# Altium PCB lab1.PcbDoc
Units mm, origin at the board's own origin, x right, y up, seen from the top; angles counter-clockwise.
Board outline 49 x 56.6 mm, 2 copper layers (Top Layer, Bottom Layer); 38 components, 47 nets, 159 pads, 43 vias.
Unrouted connection lines stored in the file: 3.
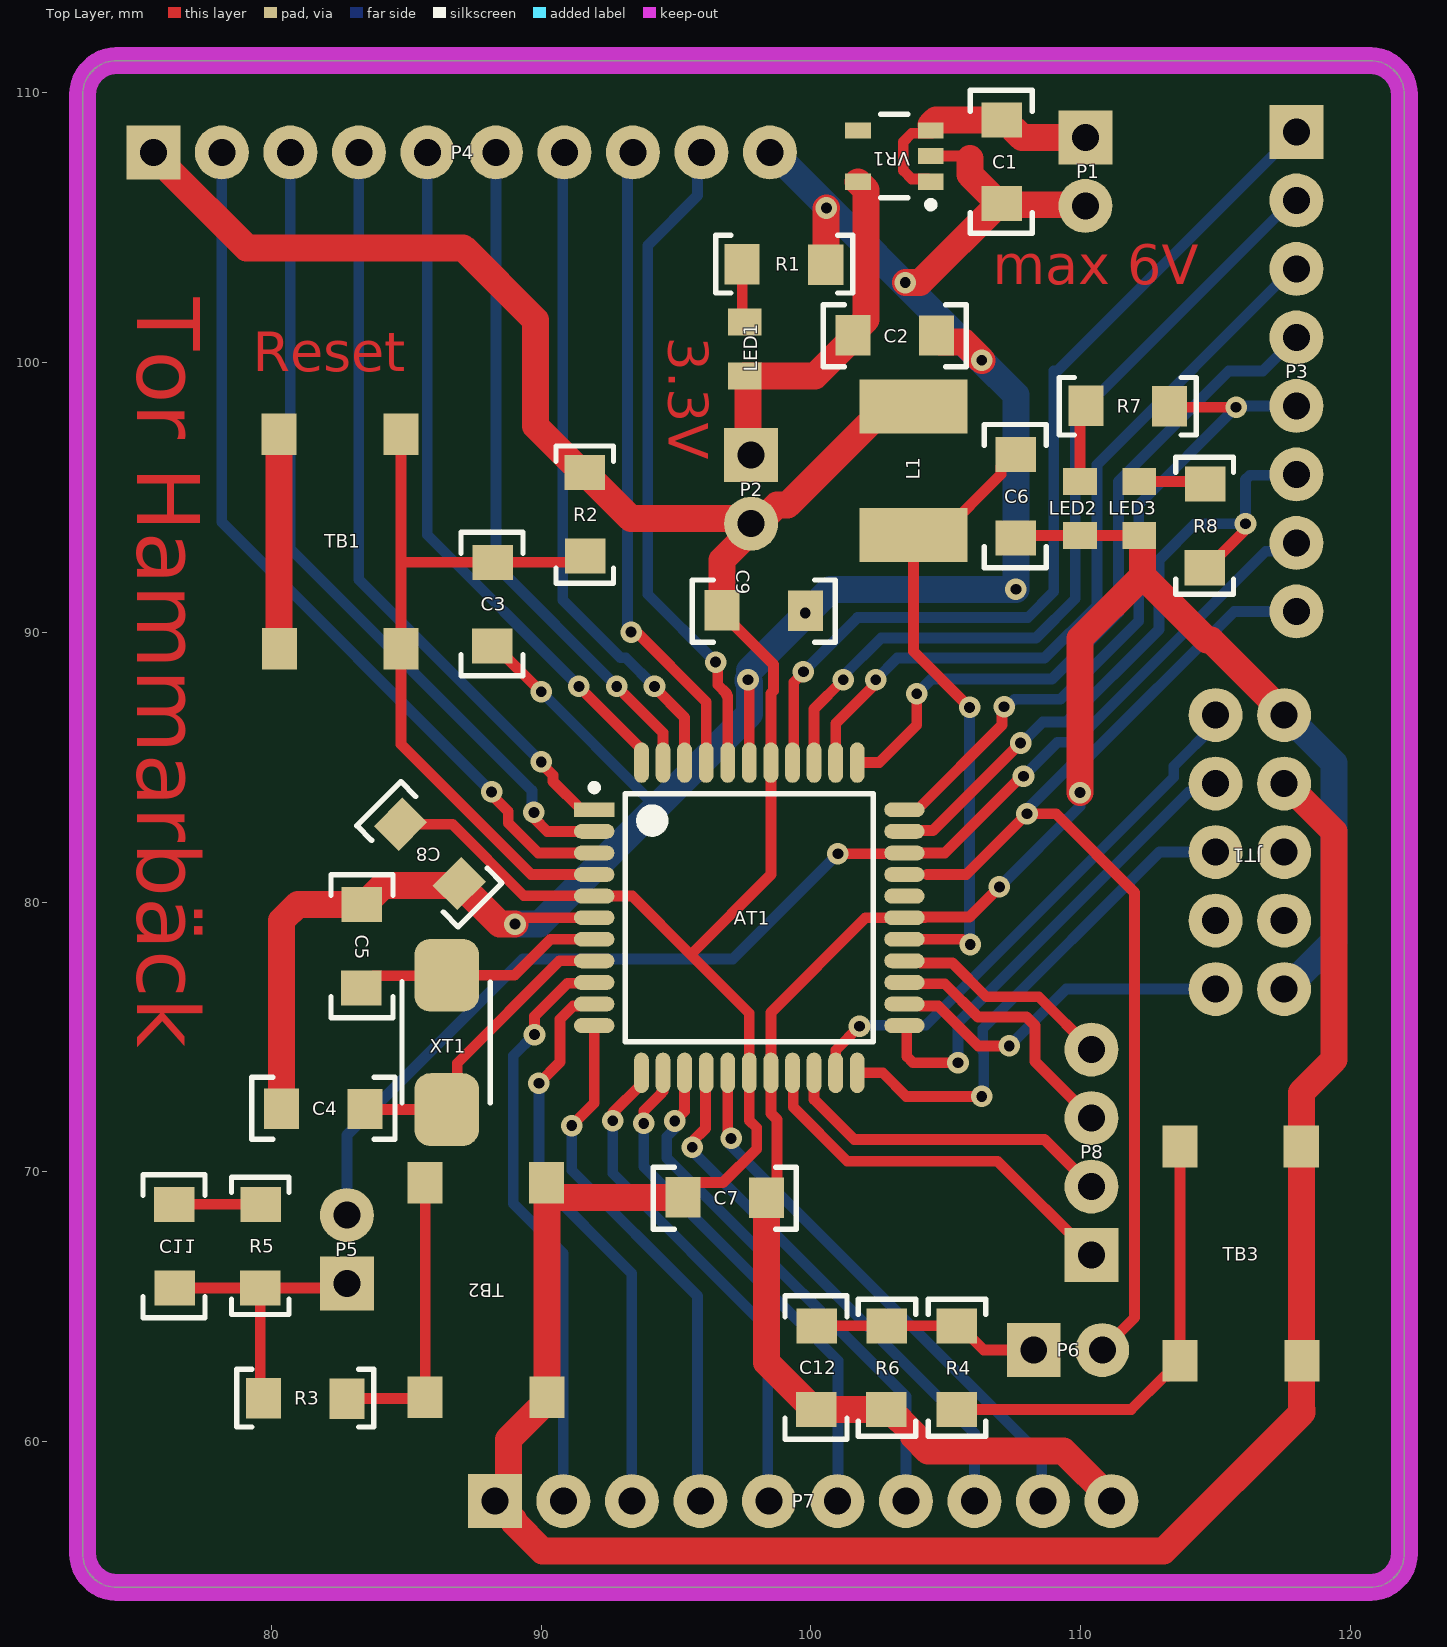
[diagram p0: Top Layer view]
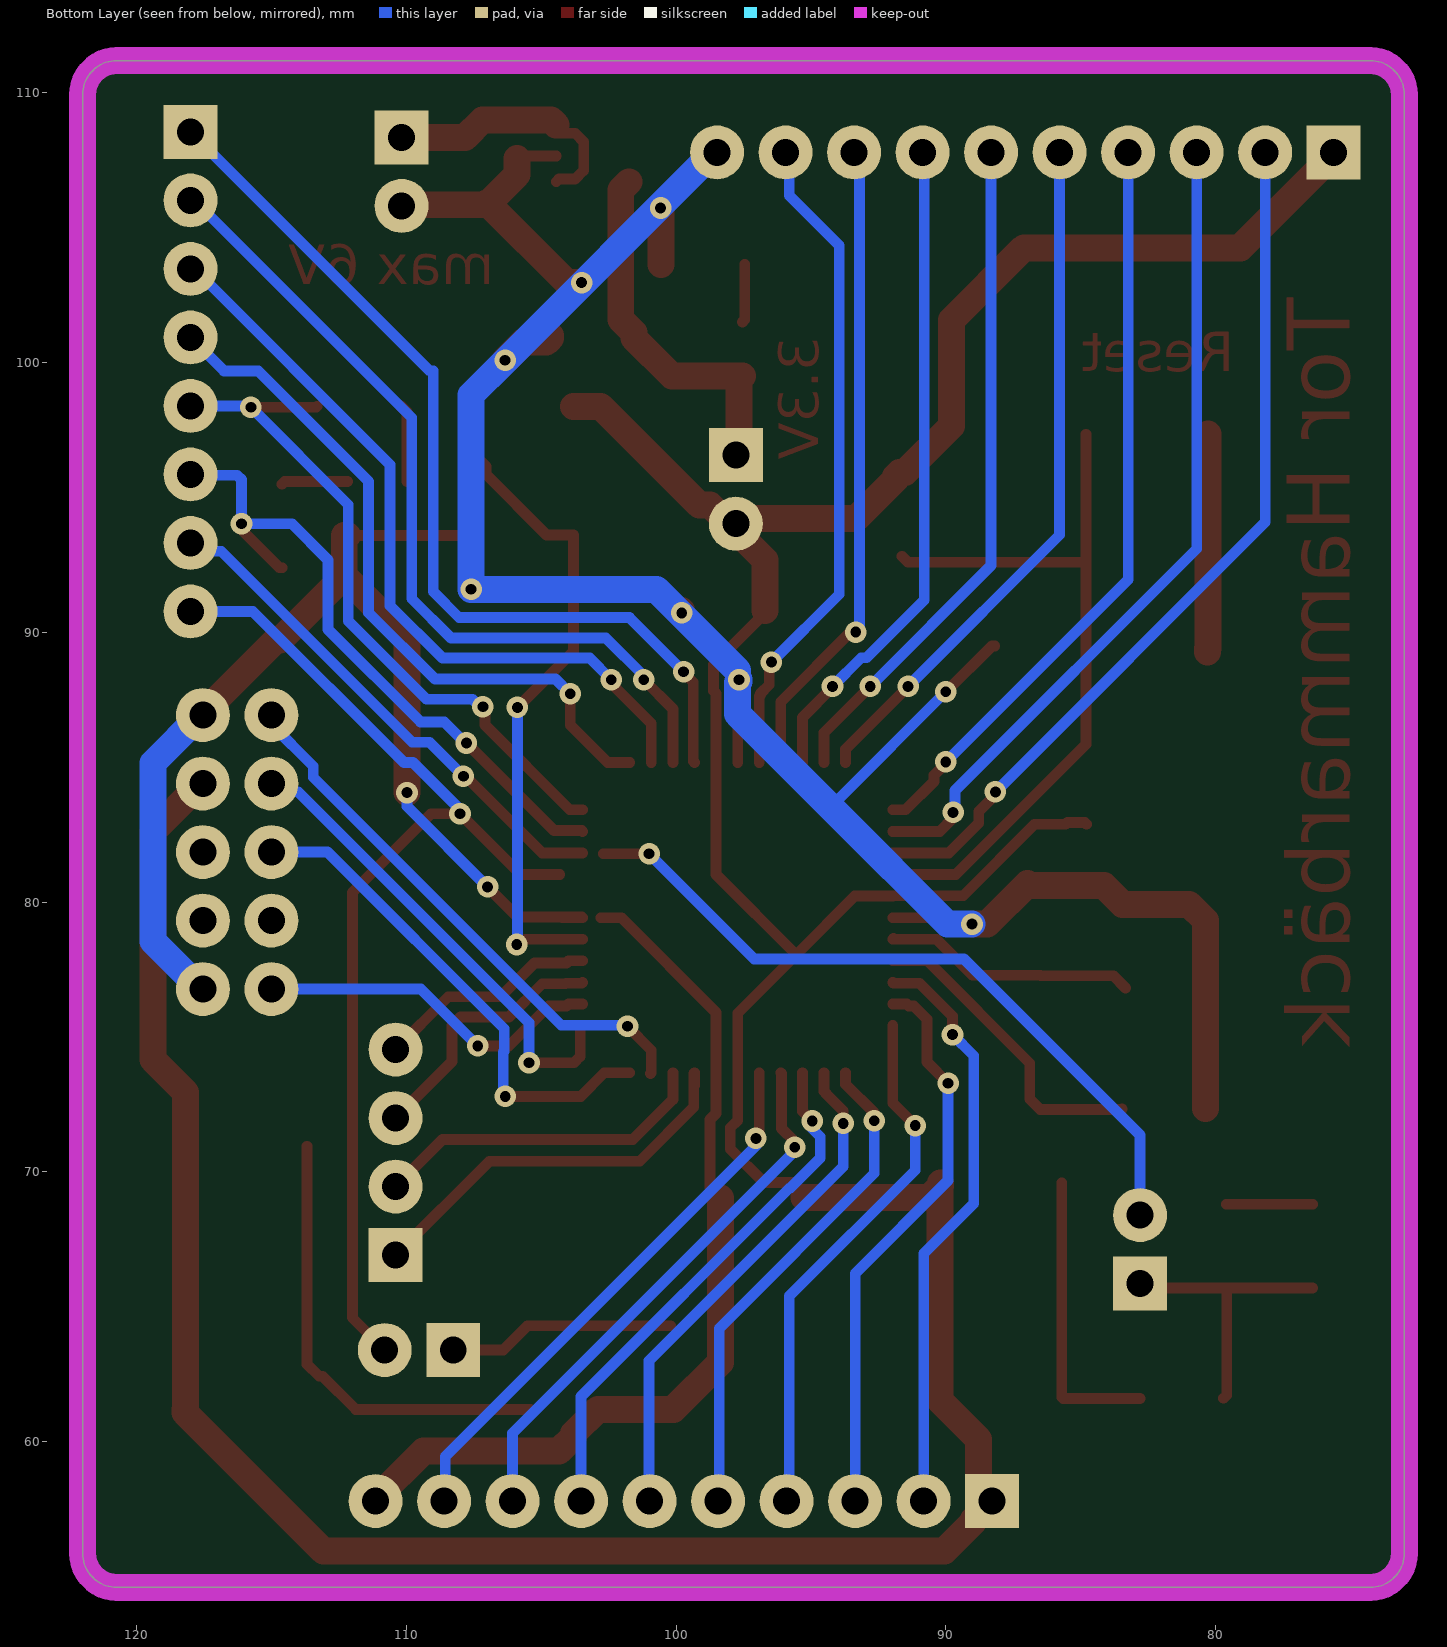
[diagram p1: Bottom Layer view, seen from below]

## Layer stack, top to bottom
Top Solder: solder mask 0.0102, Solder Resist, Dk 3.5
Top Layer: signal copper 0.0356
Dielectric 1: dielectric 0.32, FR-4, Dk 4.8
Bottom Layer: signal copper 0.0356
Bottom Solder: solder mask 0.0102, Solder Resist, Dk 3.5

## Board outline
73,55.87 ccw(c74.27,55.87) 74.27,54.6 120.73,54.6 ccw(c120.73,55.87) 122,55.87 122,58.8 122,109.93 ccw(c120.73,109.93) 120.73,111.2 74.27,111.2 ccw(c74.27,109.93) 73,109.93

## Design rules (kind name [scope] priority, off if disabled: settings)
Clearance MCURule [WithinRoom('MCURoom')] p1: gap=0.35 ignorepadtopadclearanceinfootprint=FALSE except(0.25: Arc-SMDPad Track-SMDPad SMDPad-SMDPad)
Clearance [All] p2: gap=0.35 ignorepadtopadclearanceinfootprint=FALSE except(0.001: Fill-Text Poly-Text Region-Text; 0.4: SMDPad-Fill SMDPad-Poly SMDPad-Region)
MinimumSolderMaskSliver [All] p1 off: minsoldermaskwidth=0.1
PolygonConnect [All] p1: connectstyle=Relief reliefconductorwidth=0.254 reliefentries=4 polygonreliefangle="90 Angle" airgapwidth=0.254
RoomDefinition MCURoom [False] p1: confinementstyle=ConfineIn formatcopy=TRUE lockcomponents=FALSE outline 90.45,86.535 104.869,86.535 104.869,72.261 90.45,72.261
RoutingVias [All] p1: holewidth=0.4 width=0.8 viastyle="Through Hole" minholewidth=0.4 minwidth=0.8 maxholewidth=0.4 maxwidth=0.8
SilkToSilkClearance [All] p1 off: silktosilkclearance=0.254
SilkToSolderMaskClearance [IsPad] p1 off: minsilkscreentomaskgap=0.1 clearancetoexposedcopper=TRUE
SolderMaskExpansion [All] p1: expansion=0.102 istentingtop=FALSE
Width [All] p1: maxlimit=1 minlimit=0.3 preferedwidth=0.4
27 further rules are at their usual default settings.

## Components (designator, comment, footprint, x,y, rotation, side; value= is the part's Value field where it differs from the comment)
AT1 "ATmega644PA" TQFP-44 97.716,79.427 r0 top locked
C1 "1206, capacitor" "1206, capasitor"#1 107.105,109.569 r90 top value=0
C2 "1206, capacitor" "1206, capasitor"#1 100.989,101.047 r180 top value=0
C3 "1206, capacitor" "1206, capasitor"#1 88.226,93.175 r90 top value=0
C4 "1206, capacitor" "1206, capasitor"#1 84.048,72.308 r0 top value=0
C5 "1206, capacitor" "1206, capasitor"#1 83.308,76.25 r270 top value=0
C6 "1206, capacitor" "1206, capasitor"#1 107.627,97.175 r90 top value=0
C7 "1206, capacitor" "1206, capasitor"#1 94.688,69.082 r180 top
C8 "1206, capacitor" "1206, capasitor"#1 84.394,83.313 r135 top
C9 "1206, capacitor" "1206, capasitor"#1 96.132,90.844 r180 top
C11 "1206, capacitor" "1206, capasitor"#2 76.438,65.127 r270 top value=0
C12 "1206, capacitor" "1206, capasitor"#1 100.238,64.873 r90 top value=0
JT1 "JTAG Connector" Atmel_JTAG 115.01,86.967 r270 top
L1 "Coil" "1812, coil" 103.8,96 r270 top value=0
LED1 "0805, LED" 0805_led 97.517,100.506 r270 top value="0805 LED"
LED2 "0805, LED" 0805_led 110,94.6 r90 top value="0805 LED"
LED3 "0805, LED" 0805_led 112.2,94.6 r90 top value="0805 LED"
P1 "1x2 Pin Header" 1x2HEADER 110.173,108.356 r0 top
P2 "1x2 Pin Header" 1x2HEADER 97.785,96.572 r0 top
P3 "1x8 Pin Header" 1x8HEADER 118,108.56 r0 top value="1x2 Pin Header"
P4 "1x10 Pin Header" 1x10HEADER 75.62,107.8 r90 top value="1x2 Pin Header"
P5 "1x2 Pin Header" 1x2HEADER 82.8,65.86 r180 top
P6 "1x2 Pin Header" 1x2HEADER 108.26,63.4 r90 top
P7 "1x10 Pin Header" 1x10HEADER 88.28,57.8 r90 top value="1x2 Pin Header"
P8 "1x4 Pin Header" 1x4HEADER 110.4,66.92 r180 top value="1x2 Pin Header"
R1 "1206, resistor" 1206#1 100.836,103.653 r0 top value=0
R2 "1206, resistor" 1206#2 91.615,92.543 r270 top value=0
R3 "1206, resistor" 1206#1 83.086,61.614 r0 top value=0
R4 "1206, resistor" 1206#1 105.414,60.914 r270 top value=0
R5 "1206, resistor" 1206#1 79.586,69.086 r90 top value=0
R6 "1206, resistor" 1206#1 102.814,60.914 r270 top value=0
R7 "1206, resistor" 1206#1 109.914,98.386 r180 top value=0
R8 "1206, resistor" 1206#1 114.597,95.784 r90 top value=0
TB1 "Tactile Button" "Button smd" 80.3,89.4 r90 top value="Button SMD"
TB2 "Tactile Button" "Button smd" 90.2,69.6 r270 top value="Button SMD"
TB3 "Tactile Button" "Button smd" 118.177,70.95 r270 top value="Button SMD"
VR1 "3.3V Reg" SOT23-5 103.094,107.659 r180 top value=TPS79333DBVR
XT1 "XTAL TXC 7A" XTAL_SMD_LP 86.496,77.313 r270 top value=0

## Footprints (in the part's own frame and the unit in brackets; to place one, negate y for a bottom-side part, rotate by r counter-clockwise, add the part's x,y. Pads: shape width x height; smd on the part's side, far side on the other; paste and mask are expansions set on the pad)
1x2HEADER [mm] "Pad Diameter 2 mm, Hole  1 mm, Pitch 2.54 mm"
  rect 2x2 hole 1: 1(0,0)
  round 2 hole 1: 2(0,-2.54)
  body extent -1.27,-3.81 1.27,1.27, height 5.94
1x4HEADER [mm] "Pad Diameter 2 mm, Hole  1 mm, Pitch 2.54 mm"
  rect 2x2 hole 1: 1(0,0)
  round 2 hole 1: 2(0,-2.54) 3(0,-5.08) 4(0,-7.62)
  body extent -1.27,-8.89 1.27,1.27, height 5.94
1x8HEADER [mm] "Pad Diameter 2 mm, Hole  1 mm, Pitch 2.54 mm"
  rect 2x2 hole 1: 1(0,0)
  round 2 hole 1: 2(0,-2.54) 3(0,-5.08) 4(0,-7.62) 5(0,-10.16) 6(0,-12.7) 7(0,-15.24) 8(0,-17.78)
  body extent -1.27,-19.05 1.27,1.27, height 5.94
1x10HEADER [mm] "Pad Diameter 2 mm, Hole  1 mm, Pitch 2.54 mm"
  rect 2x2 hole 1: 1(0,0)
  round 2 hole 1: 2(0,-2.54) 3(0,-5.08) 4(0,-7.62) 5(0,-10.16) 6(0,-12.7) 7(0,-15.24) 8(0,-17.78) 9(0,-20.32) 10(0,-22.86)
  body extent -1.27,-24.13 1.27,1.27, height 5.94
0805_led [mm]
  rect 1x1.25 smd: 0(-1,0.025) 1(1,0.025)
  body extent -1.03,-0.6 0.99,0.65, height 1.1
1206#1 [mm] "Generic 1206"
  rect 1.3x1.5 smd: 0(-3.384,-0.003) 1(-0.286,-0.014)
  silkscreen extent -4.37,-1.07 0.71,1.07, body extent -3.46,-0.79 -0.26,0.81
1206#2 [mm] "Generic 1206"
  rect 1.3x1.5 smd: 0(-3.384,0.003) 1(-0.286,0.014)
  silkscreen extent -4.37,-1.07 0.71,1.07, body extent -3.46,-0.81 -0.26,0.79
"1206, capasitor"#1 [mm] "Generic 1206"
  rect 1.3x1.5 smd: 0(-3.673,0.038) 1(-0.575,0.026)
  silkscreen extent -4.78,-1.1 0.53,1.2, body extent -3.78,-0.79 -0.58,0.81
"1206, capasitor"#2 [mm] "Generic 1206"
  rect 1.3x1.5 smd: 0(-3.673,-0.038) 1(-0.575,-0.026)
  silkscreen extent -4.78,-1.2 0.53,1.1, body extent -3.78,-0.81 -0.58,0.79
"1812, coil" [mm]
  rect 2x4 smd: 1(-2.385,0) 2(2.385,0)
  body extent -2.3,-1.6 2.3,1.6, height 2.6
Atmel_JTAG [mm]
  round 2 hole 1: 1(0.028,-0.01) 2(0.028,2.53) 3(2.568,-0.01) 4(2.568,2.53) 5(5.108,-0.01) 6(5.108,2.53) 7(7.648,-0.01) 8(7.648,2.53) 9(10.188,-0.01) 10(10.188,2.53)
  body extent -1.15,-1.36 11.55,3.64, height 8.6
"Button smd" [mm]
  rect 1.55x1.3 smd: 1(0,0) 2(0,-4.5) 3(7.95,0.023) 4(7.95,-4.5)
  body extent -0.55,-5.25 8.45,0.75, height 4.3
SOT23-5 [mm] "SOT23, 5-Leads, Body 2,90x2,80mm, Pitch 0,95mm, IPC Medium Density"
  rect 0.95x0.6 smd: 1(-1.35,0.95) 2(-1.35,0) 3(-1.35,-0.95) 4(1.35,-0.95) 5(1.35,0.95)
  silkscreen extent -1.48,-1.55 0.5,1.92, body extent -1.25,-1.5 1.25,1.5, height 1.1
TQFP-44 [mm] "QFP, 44-Leads, Body 10,00x10,00mm, Pitch 0,80mm, IPC Medium Density"
  rect 1.5x0.55 smd: 1(-5.75,4)
  oval 1.5x0.55 smd: 2(-5.75,3.2) 3(-5.75,2.4) 4(-5.75,1.6) 5(-5.75,0.8) 6(-5.75,0) 7(-5.75,-0.8) 8(-5.75,-1.6) 9(-5.75,-2.4) 10(-5.75,-3.2) 11(-5.75,-4) 23(5.75,-4) 24(5.75,-3.2) 25(5.75,-2.4) 26(5.75,-1.6) 27(5.75,-0.8) 28(5.75,0) 29(5.75,0.8) 30(5.75,1.6) 31(5.75,2.4) 32(5.75,3.2) 33(5.75,4)
  oval 0.55x1.5 smd: 12(-4,-5.75) 13(-3.2,-5.75) 14(-2.4,-5.75) 15(-1.6,-5.75) 16(-0.8,-5.75) 17(0,-5.75) 18(0.8,-5.75) 19(1.6,-5.75) 20(2.4,-5.75) 21(3.2,-5.75) 22(4,-5.75) 34(4,5.75) 35(3.2,5.75) 36(2.4,5.75) 37(1.6,5.75) 38(0.8,5.75) 39(0,5.75) 40(-0.8,5.75) 41(-1.6,5.75) 42(-2.4,5.75) 43(-3.2,5.75) 44(-4,5.75)
  silkscreen extent -5.87,-4.6 4.6,4.95, body extent -6,-6 6,6, height 1.1
XTAL_SMD_LP [mm] "Pad 1.7x2.4, Pitch 3.7"
  rrect50% 2.7x2.4 smd: 1(0.02,0) 2(5,0)
  silkscreen extent 0.26,-1.66 4.76,1.62, body extent 0.02,-1.6 5.02,1.6, height 1.35

## Part data
AT1: "ATmega644PA - Small but big and PicoPower", Farnell=2484915
JT1: library part "Atmel JTAG", "Atmel JTAG Connector"
P1 P2 P3 P4 P5 P6 P7 P8: "2.54 mm, TH"
R1 R2 R3 R4 R5 R6 R7 R8: "Resistor"
TB1 TB2 TB3: library part "Button SMD", "Tactile Switch Small Low", ELFA=110-87-406
VR1: library part TPS79333DBR, "3.3V Reg, Ultra-Low Noise, 200 mA", Input Voltage="Vin 6V (max)", Drop Out=102mV, Farnell=1287689
XT1: "16 MHz, SMD, 5mm x 3,2mm, 30 ppm", Farnell=1841946

## Via types
v1: diameter 0.8, hole 0.4, Top Layer to Bottom Layer, 43 vias

## Nets (pads, with @x,y where several pads share a name; then routed paths per layer and width w, separated by ;. In a path a pad name is that pad's centre, name@x,y a point inside that pad or via, vN(x,y) a via of type N, cw(c..) or ccw(c..) an arc to the next point about the centre after c; other vN are vias at no path point)
3V3: AT1.5 AT1.17 AT1.38 C7.1 C8.1 C9.1 JT1.4 L1.1 P2.2 P4.1 P7.1 R2.0 TB2.1 TB2.3 TB3.1 TB3.3 | length 156.6
  Top Layer w0.4: C8.1 84.853,82.958 85.489,82.958 85.56,82.887 86.71,82.887 89.357,80.24 91.953,80.24 AT1.5 93.373,80.227 95.545,78.055 ; C7.1 95.263,69.155 95.713,69.605 96.744,69.605 97.989,70.85 97.989,71.638 97.716,71.91 AT1.17 97.716,75.884 95.545,78.055 ; C9.1 96.707,90.717 98.616,88.808 98.616,87.836 98.516,87.736 AT1.38 98.516,81.027 95.545,78.055
  Top Layer w1: P4.1 76.12,107.3 76.12,107.224 79.083,104.261 87.108,104.261 89.792,101.577 89.792,97.653 91.518,95.927 91.718,95.927 91.868,95.777 91.868,95.677 93.321,94.223 97.864,94.223 P2.2@98.056,94.032 ; TB2.1 90.2,69.475 TB2.1@90.211,69.464 ; C7.1 90.62,69.055 TB2.1@90.211,69.464 ; C9.1 96.707,92.684 P2.2@98.056,94.032 ; L1.1 102.8,98.385 102.3,97.885 99.137,94.722 98.746,94.722 P2.2@98.056,94.032 ; JT1.4 117.616,84.4 119.39,82.626 119.39,74.162 118.177,72.949 TB3.1 118.177,69.15 118.189,69.139 118.189,63 118.189,61.211 118.2,61.2 118.2,61.075 113.075,55.95 90.054,55.95 88.97,57.034 88.97,57.11 P7.1 88.78,58.3 88.78,60.083 90.223,61.525 TB2.3 90.211,61.661 90.211,69.055 TB2.1@90.211,69.464
GND: AT1.6 AT1.18 AT1.28 AT1.39 C1.0 C2.0 C3.0 C4.0 C5.0 C6.0 C7.0 C8.0 C9.0 C11.0 C12.0 JT1.2 JT1.10 LED2.0 LED3.0 P1.2 P4.10 P7.10 R1.1 R5.1 R6.1 TB1.1 TB1.3 VR1.2 | length 181
  Top Layer w0.4: C11.0 R5.1 ; C3.0 88.289,89.502 89.991,87.8 v1(90,87.8) ; v1(89.03,79.19) 89.138,79.19 89.375,79.427 AT1.6 ; v1(97.666,88.25) 97.712,88.204 97.712,85.181 AT1.39 ; C7.0 98.739,69.422 98.739,71.948 98.516,72.171 AT1.18 98.516,75.916 102.027,79.427 AT1.28@102.79,79.427 ; 104.227,79.427 AT1.28 103.495,79.456 105.875,79.456 v1(106.986,80.567) ; VR1.2 105.811,107.659 105.893,107.576 ; C6.0@107.6,93.491 C6.0 107.686,93.6 LED2.0 LED3.0
  Top Layer w1: TB1.3 80.289,97.339 80.289,89.411 TB1.1 TB1.1@80.3,89.275 ; C4.0@80.377,72.346 80.377,79.318 80.982,79.923 C5.0 83.446,79.923 84.142,80.618 86.894,80.618 C8.0 88.464,79.19 v1(89.03,79.19) ; C7.0 98.361,62.939 100.1,61.2 C12.0 R6.1 102.9,61.2 103.8,60.3 103.8,60.198 104.348,59.65 109.366,59.65 111.14,57.876 P7.10 ; v1(99.789,90.725) 99.805,90.741 C9.0 ; R1.1 100.55,105.714 v1(100.573,105.737) ; v1(103.5,102.971) 104.042,102.971 C1.0@106.967,105.896 ; C2.0 104.662,100.91 104.812,100.76 105.666,100.76 v1(106.336,100.09) ; 105.893,107.576 105.893,106.97 C1.0@106.967,105.896 ; v1(109.975,84.063) 109.975,89.773 112.3,92.098 ; P1.2 110.133,105.856 107.107,105.856 C1.0 C1.0@106.967,105.896 ; LED3.0 112.3,93.6 112.3,92.098 ; JT1.2 117.54,87.016 114.835,89.721 114.677,89.721 112.3,92.098
  Bottom Layer w0.4: v1(90,87.8) 93.97,83.83 93.97,83.223 ; v1(106.986,80.567) 109.975,83.556 v1(109.975,84.063)
  Bottom Layer w1: v1(89.03,79.19) 89.937,79.19 93.97,83.223 97.716,86.969 97.716,88.14 97.666,88.19 v1(97.666,88.25) ; v1@97.716,88.584 100.733,91.6 v1(107.6,91.6) 107.6,98.8 106.323,100.077 P4.10@98.6,107.8 ; JT1.10 117.616,76.78 119.39,78.554 119.39,85.166 117.616,86.94 JT1.2
NetAT1_4: AT1.4 C3.1 R2.1 TB1.2 TB1.4 | length 27.6
  Top Layer w0.4: TB1.4 84.8,92.6 ; R2.1 91.4,92.6 C3.1 84.8,92.6 ; AT1.4 90.45,81.027 89.631,81.027 84.8,85.858 TB1.2 84.8,92.6
NetAT1_7: AT1.7 C5.1 XT1.1 | length 9.4
  Top Layer w0.4: C5.1 83.785,77.275 86.478,77.275 XT1.1 89.008,77.293 90.342,78.627 91.92,78.627 91.943,78.65 AT1.7
NetAT1_8: AT1.8 C4.1 XT1.2 | length 11.6
  Top Layer w0.4: C4.1 83.495,72.313 XT1.2 86.885,72.702 86.885,74.029 90.683,77.827 AT1.8
NetAT1_27: AT1.27 C6.1 L1.2 | length 23.4
  Top Layer w0.4: AT1.27 v1@105.604,78.627 ; v1(105.883,87.223) 103.8,89.306 L1.2 104.8,93.615 107.05,95.865 107.05,96.15 107.5,96.6 C6.1
  Bottom Layer w0.4: v1(105.883,87.223) 105.883,78.457 v1(105.906,78.434)
NetC1_1: C1.1 P1.1 VR1.1 VR1.3 | length 9.5
  Top Layer w0.4: VR1.1 104.344,106.809 103.741,106.809 103.419,107.131 103.419,108.187 103.741,108.509 104.344,108.509 VR1.3
  Top Layer w1: VR1.3@104.444,108.809 104.629,108.994 C1.1 107.178,108.994 107.816,108.356 P1.1
NetC2_1: C2.1 LED1.1 P2.1 VR1.5 | length 13.7
  Top Layer w1: LED1.1 LED1.1@97.663,99.506 ; P2.1 97.663,96.694 LED1.1@97.663,99.506 ; VR1.5 102.05,106.403 102.05,101.607 101.564,101.121 C2.1 101.564,100.921 100.15,99.506 LED1.1@97.663,99.506
NetC11_1: C11.1 P5.1 R3.0 R5.0 | length 10.6
  Top Layer w0.4: C11.1 R5.0 ; R3.0 79.589,61.724 R5.0 ; P5.1 82.642,65.702 R5.0
NetC12_1: C12.1 P6.1 R4.0 R6.0 | length 8.4
  Top Layer w0.4: C12.1 R6.0 R4.0 105.511,64.298 106.409,63.4 P6.1
NetLED1_0: LED1.0 R1.0 | length 2.2
  Top Layer w0.4: R1.0 97.452,101.596 LED1.0
NetLED2_1: LED2.1 R7.1 | length 2.9
  Top Layer w0.4: LED2.1 109.975,98.175 R7.1
NetLED3_1: LED3.1 R8.1 | length 2.5
  Top Layer w0.4: LED3.1 114.509,95.6 R8.1
NetR3_1: R3.1 TB2.2 TB2.4 | length 10.9
  Top Layer w0.4: R3.1 85.65,61.6 TB2.4 TB2.2
NetR4_1: R4.1 TB3.2 TB3.4 | length 17
  Top Layer w0.4: R4.1 111.877,61.2 113.102,62.425 113.227,62.425 113.677,62.875 TB3.4 TB3.2
PA0: AT1.37 P3.1 | length 34.9
  Top Layer w0.4: AT1.37 99.366,85.227 99.366,88.157 99.722,88.512 v1(99.722,88.541)
  Bottom Layer w0.4: v1(99.722,88.541) 101.731,90.55 108.035,90.55 109,91.515 109,99.7 109.14,99.7 P3.1
PA1: AT1.36 P3.2 | length 31.7
  Top Layer w0.4: AT1.36 100.116,87.164 101.2,88.248 v1(101.2,88.25)
  Bottom Layer w0.4: v1(101.2,88.25) 101.2,88.394 102.606,89.8 108.346,89.8 109.8,91.254 109.8,97.96 117.86,106.02 P3.2
PA2: AT1.35 P3.3 | length 28.7
  Top Layer w0.4: AT1.35 100.916,86.623 102.4,88.106 v1(102.4,88.25)
  Bottom Layer w0.4: v1(102.4,88.25) 103.2,89.05 108.656,89.05 110.6,90.994 110.6,96.22 117.86,103.48 P3.3
PA3: AT1.34 P3.4 | length 26.3
  Top Layer w0.4: AT1.34 102.531,85.177 103.889,86.535 103.92,86.566 v1(103.92,87.725)
  Bottom Layer w0.4: v1(103.92,87.725) 104.467,88.272 108.939,88.272 111.4,90.733 111.4,95.602 115.491,99.693 116.753,99.693 P3.4
PA4: AT1.33 P3.5 R7.0 | length 26.1
  Top Layer w0.4: AT1.33 103.941,83.427 107.085,86.571 107.085,87.173 v1(107.162,87.25) ; R7.0 113.341,98.346 v1(115.76,98.346)
  Bottom Layer w0.4: v1(107.162,87.25) 107.27,87.25 107.542,87.522 109.25,87.522 112.15,90.422 112.15,94.736 v1(115.76,98.346) 115.814,98.4 P3.5
PA5: AT1.32 P3.6 R8.0 | length 24.8
  Top Layer w0.4: AT1.32 103.495,82.656 104.525,82.656 v1(107.772,85.903) ; R8.0 114.7,92.4 116.11,93.81 v1(116.11,94.027)
  Bottom Layer w0.4: v1(107.772,85.903) 107.814,85.903 108.591,86.68 109.469,86.68 112.9,90.112 112.9,92.689 114.238,94.027 v1(116.11,94.027) 116.11,95.667 116.273,95.83 117.97,95.83 P3.6
PA6: AT1.31 P3.7 P5.2 | length 46.5
  Top Layer w0.4: v1@101.027,81.827 v1(101,81.8) 102.703,81.8 ; AT1.31 104.963,81.827 107.805,84.669 v1(107.881,84.669)
  Bottom Layer w0.4: P5.2 82.8,71.371 89.329,77.9 97.1,77.9 v1(101,81.8) ; v1(107.881,84.669) 109.143,85.93 109.779,85.93 116.863,93.014 117.694,93.014 P3.7
PA7: AT1.30 P3.8 P6.2 | length 40.5
  Top Layer w0.4: 104.308,81.027 105.76,81.027 v1(108.01,83.277) 109.088,83.277 112,80.365 112,64.6 P6.2
  Bottom Layer w0.4: v1(108.01,83.277) 108.01,83.442 109.749,85.18 110.09,85.18 115.69,90.78 P3.8
PB0: AT1.40 P4.9 | length 24.7
  Top Layer w0.4: v1(96.466,88.903) 96.543,88.826 96.543,88.061 96.866,87.738 96.866,87.686 96.916,87.636 AT1.40
  Bottom Layer w0.4: P4.9 95.8,107.66 95.8,106.2 93.95,104.35 93.95,91.419 v1(96.466,88.903)
PB1: AT1.41 P4.8 | length 24
  Top Layer w0.4: v1(93.335,90.013) 93.531,90.013 96.116,87.427 96.116,86.535 AT1.41
  Bottom Layer w0.4: v1(93.335,90.013) 93.2,90.148 93.2,107.6 P4.8
PB2: AT1.42 P4.7 | length 24.6
  Top Layer w0.4: v1(94.2,88) 94.2,87.967 95.316,86.851 AT1.42
  Bottom Layer w0.4: P4.7 90.8,107.74 90.8,91.204 92.941,89.063 93.137,89.063 v1(94.2,88)
PB3: AT1.43 P4.6 | length 25.2
  Top Layer w0.4: v1(92.8,88) 94.516,86.284 AT1.43
  Bottom Layer w0.4: P4.6 88.32,92.48 v1(92.8,88)
PB4: AT1.44 P4.5 | length 25.9
  Top Layer w0.4: v1(91.4,88) 91.4,87.984 93.716,85.668 AT1.44
  Bottom Layer w0.4: P4.5 85.78,93.62 v1(91.4,88)
PB5: AT1.1 P4.4 | length 28.2
  Top Layer w0.4: v1(90,85.2) 90,85.146 90.438,84.708 90.438,84.48 91.491,83.427 AT1.1
  Bottom Layer w0.4: P4.4 83.24,91.96 89.603,85.597 v1@89.964,85.236
PB6: AT1.2 P4.3 | length 30.9
  Top Layer w0.4: v1(89.731,83.331) 89.731,83.123 90.227,82.627 AT1.2
  Bottom Layer w0.4: P4.3 80.7,93.1 89.654,84.146 89.654,83.407 v1(89.731,83.331)
PB7: AT1.3 P4.2 | length 32.9
  Top Layer w0.4: v1(88.161,84.09) 88.161,83.982 88.781,83.362 88.781,82.937 89.891,81.827 90.45,81.827 AT1.3
  Bottom Layer w0.4: P4.2 78.16,94.091 v1(88.161,84.09)
PC0: AT1.19 P8.1 | length 15.1
  Top Layer w0.4: AT1.19@99.316,73.202 AT1.19 99.341,73.652 99.341,72.406 101.348,70.4 106.92,70.4 P8.1
PC1: AT1.20 P8.2 | length 12.6
  Top Layer w0.4: AT1.20 100.116,72.692 101.608,71.2 108.66,71.2 P8.2
PC6: AT1.25 P8.3 | length 9.8
  Top Layer w0.4: AT1.25 103.495,76.998 104.076,76.998 104.097,76.977 104.869,76.977 104.959,76.977 106.193,75.743 107.995,75.743 108.304,75.434 108.304,74.096 P8.3
PC7: AT1.26 P8.4 | length 8.3
  Top Layer w0.4: AT1.26 103.982,77.827 104.057,77.752 104.869,77.752 105.244,77.752 106.503,76.493 108.447,76.493 P8.4
PD0: AT1.9 P7.2 | length 21.8
  Top Layer w0.4: v1(89.751,75.092) 89.751,75.773 90.977,76.998 91.938,76.998 AT1.9
  Bottom Layer w0.4: v1(89.751,75.092) 88.965,74.306 88.965,68.835 90.82,66.98 P7.2
PD1: AT1.10 P7.3 | length 21.1
  Top Layer w0.4: v1(89.915,73.289) 90.701,74.075 90.701,75.662 91.191,76.152 91.376,76.152 91.451,76.227 AT1.10
  Bottom Layer w0.4: v1(89.915,73.289) 89.915,69.685 93.36,66.24 P7.3
PD2: AT1.11 P7.4 | length 19.9
  Top Layer w0.4: v1(91.133,71.72) 91.674,72.261 91.966,72.553 AT1.11
  Bottom Layer w0.4: v1(91.133,71.72) 91.133,70.067 95.8,65.4 95.8,57.9 P7.4
PD3: AT1.12 P7.5 | length 18.7
  Top Layer w0.4: v1(92.654,71.898) 92.661,71.905 92.661,72.2 93.716,73.255 AT1.12
  Bottom Layer w0.4: v1(92.654,71.898) 92.649,71.893 92.649,69.951 98.4,64.2 98.4,57.84 P7.5
PD4: AT1.13 P7.6 | length 19.4
  Top Layer w0.4: v1(93.8,71.8) 93.8,72.26 94.441,72.902 94.441,72.919 94.516,72.994 AT1.13
  Bottom Layer w0.4: v1(93.8,71.8) 93.8,70.2 101,63 101,57.82 P7.6 P7.6@100.8,57.98
PD5: AT1.14 P7.7 | length 19.8
  Top Layer w0.4: v1(94.95,71.889) 95.316,72.255 AT1.14
  Bottom Layer w0.4: v1(94.95,71.889) 94.95,71.606 94.653,71.309 94.653,70.521 95.774,69.4 95.8,69.4 103.52,61.68 P7.7
PD6: AT1.15 P7.8 | length 20.4
  Top Layer w0.4: v1(95.603,70.915) 95.603,71.126 96.089,71.612 96.089,73.649 AT1.15
  Bottom Layer w0.4: v1(95.603,70.915) 95.603,70.773 106.06,60.315 P7.8
PD7: AT1.16 P7.9 | length 20.9
  Top Layer w0.4: AT1.16 96.916,71.155 96.913,71.152 97.005,71.244 v1(97.039,71.244)
  Bottom Layer w0.4: v1(97.039,71.244) 97.039,70.972 97.131,70.88 108.557,59.454 108.557,57.843 P7.9
TCK: AT1.21 JT1.1 | length 20.6
  Top Layer w0.4: AT1.21@100.945,73.648 AT1.21 100.916,74.516 v1(101.8,75.4)
  Bottom Layer w0.4: v1(101.8,75.4) 101.838,75.438 104.254,75.438 104.869,76.053 113.45,84.634 113.45,85.042 115,86.592 JT1.1
TDI: AT1.24 JT1.9 | length 13.1
  Top Layer w0.4: AT1.24 103.982,76.227 104.057,76.152 104.723,76.152 104.869,76.006 106.203,74.672 v1(107.354,74.672)
  Bottom Layer w0.4: v1(107.354,74.672) 109.462,76.78 JT1.9
TDO: AT1.23 JT1.3 | length 17.9
  Top Layer w0.4: AT1.23 103.536,75.358 103.552,75.358 103.552,74.286 103.786,74.052 104.869,74.052 105.45,74.052 v1(105.453,74.049)
  Bottom Layer w0.4: v1(105.453,74.049) 105.453,75.535 114.012,84.094 114.694,84.094 JT1.3
TMS: AT1.22 JT1.5 | length 18.9
  Top Layer w0.4: AT1.22 102.663,73.677 103.537,72.803 104.869,72.803 v1(106.331,72.803)
  Bottom Layer w0.4: v1(106.331,72.803) 106.403,72.875 106.403,74.443 106.37,74.476 106.37,75.307 112.923,81.86 JT1.5
pads on no net: AT1.29 JT1.6 JT1.7 JT1.8 VR1.4

## Keep-outs
Keep-Out Layer:
  lines w1: 73,109.93 ccw(c73,109.93) 73,109.93 ; 73,109.93 cw(c74.27,109.93) 74.27,111.2 120.73,111.2 cw(c120.73,109.93) 122,109.93 122,58.8 122,55.87 cw(c120.73,55.87) 120.73,54.6 74.27,54.6 cw(c74.27,55.87) 73,55.87 73,109.93

## Other copper
Top Layer:
  text "max 6V" at 106.738,102.428 h2.5
  text "Tor Hammarbäck" at 74.238,102.409 h4 r270
  text "3.3V" at 94.243,100.955 h2.5 r270
  text "Reset" at 79.304,99.203 h2.5